# Altium PCB PCBmicro.PcbDoc
Units mil, origin at the board's own origin, x right, y up, seen from the top; angles counter-clockwise.
Board outline 4900 x 4000 mil, 2 copper layers (Top Layer, Bottom Layer); 14 components, 39 nets, 114 pads, 33 vias.
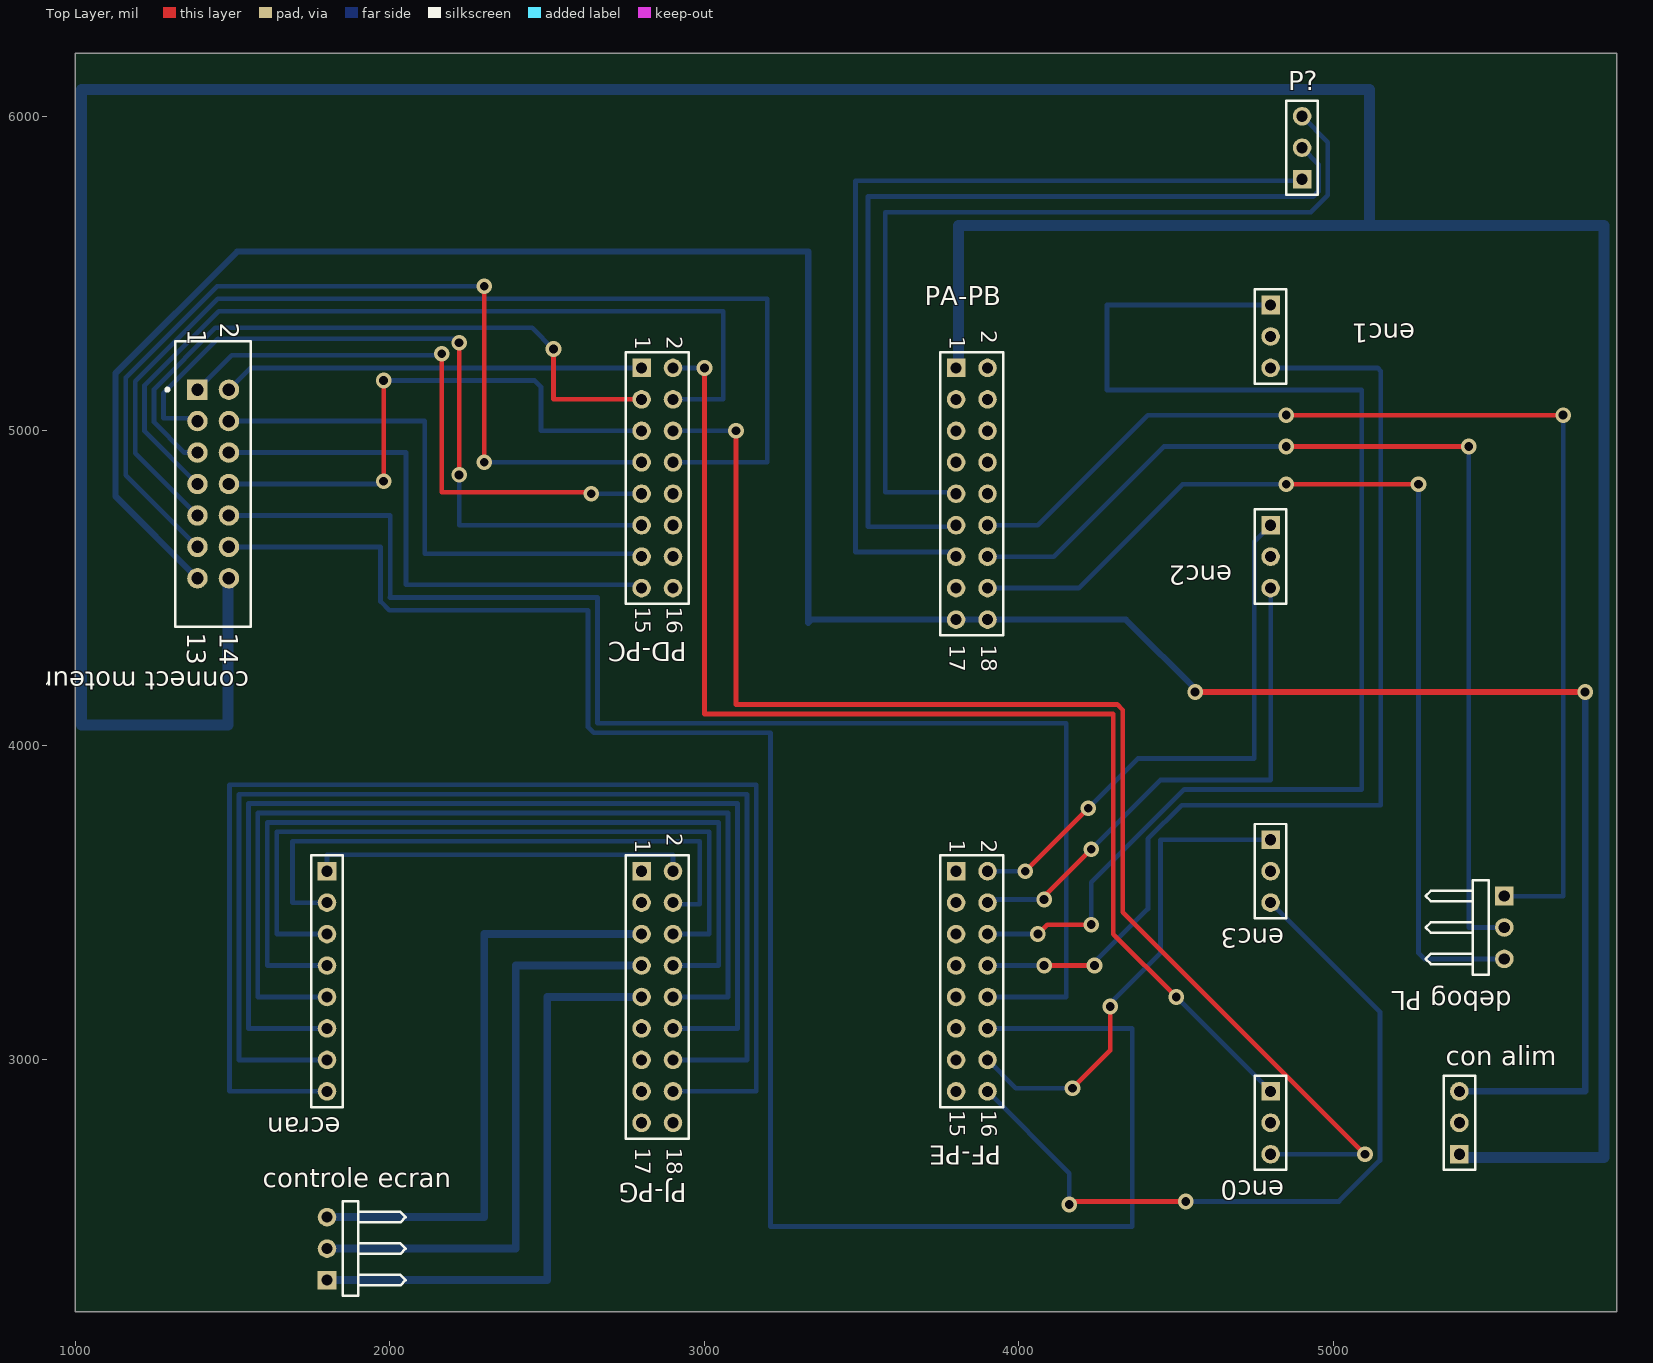
[diagram p0: Top Layer view]
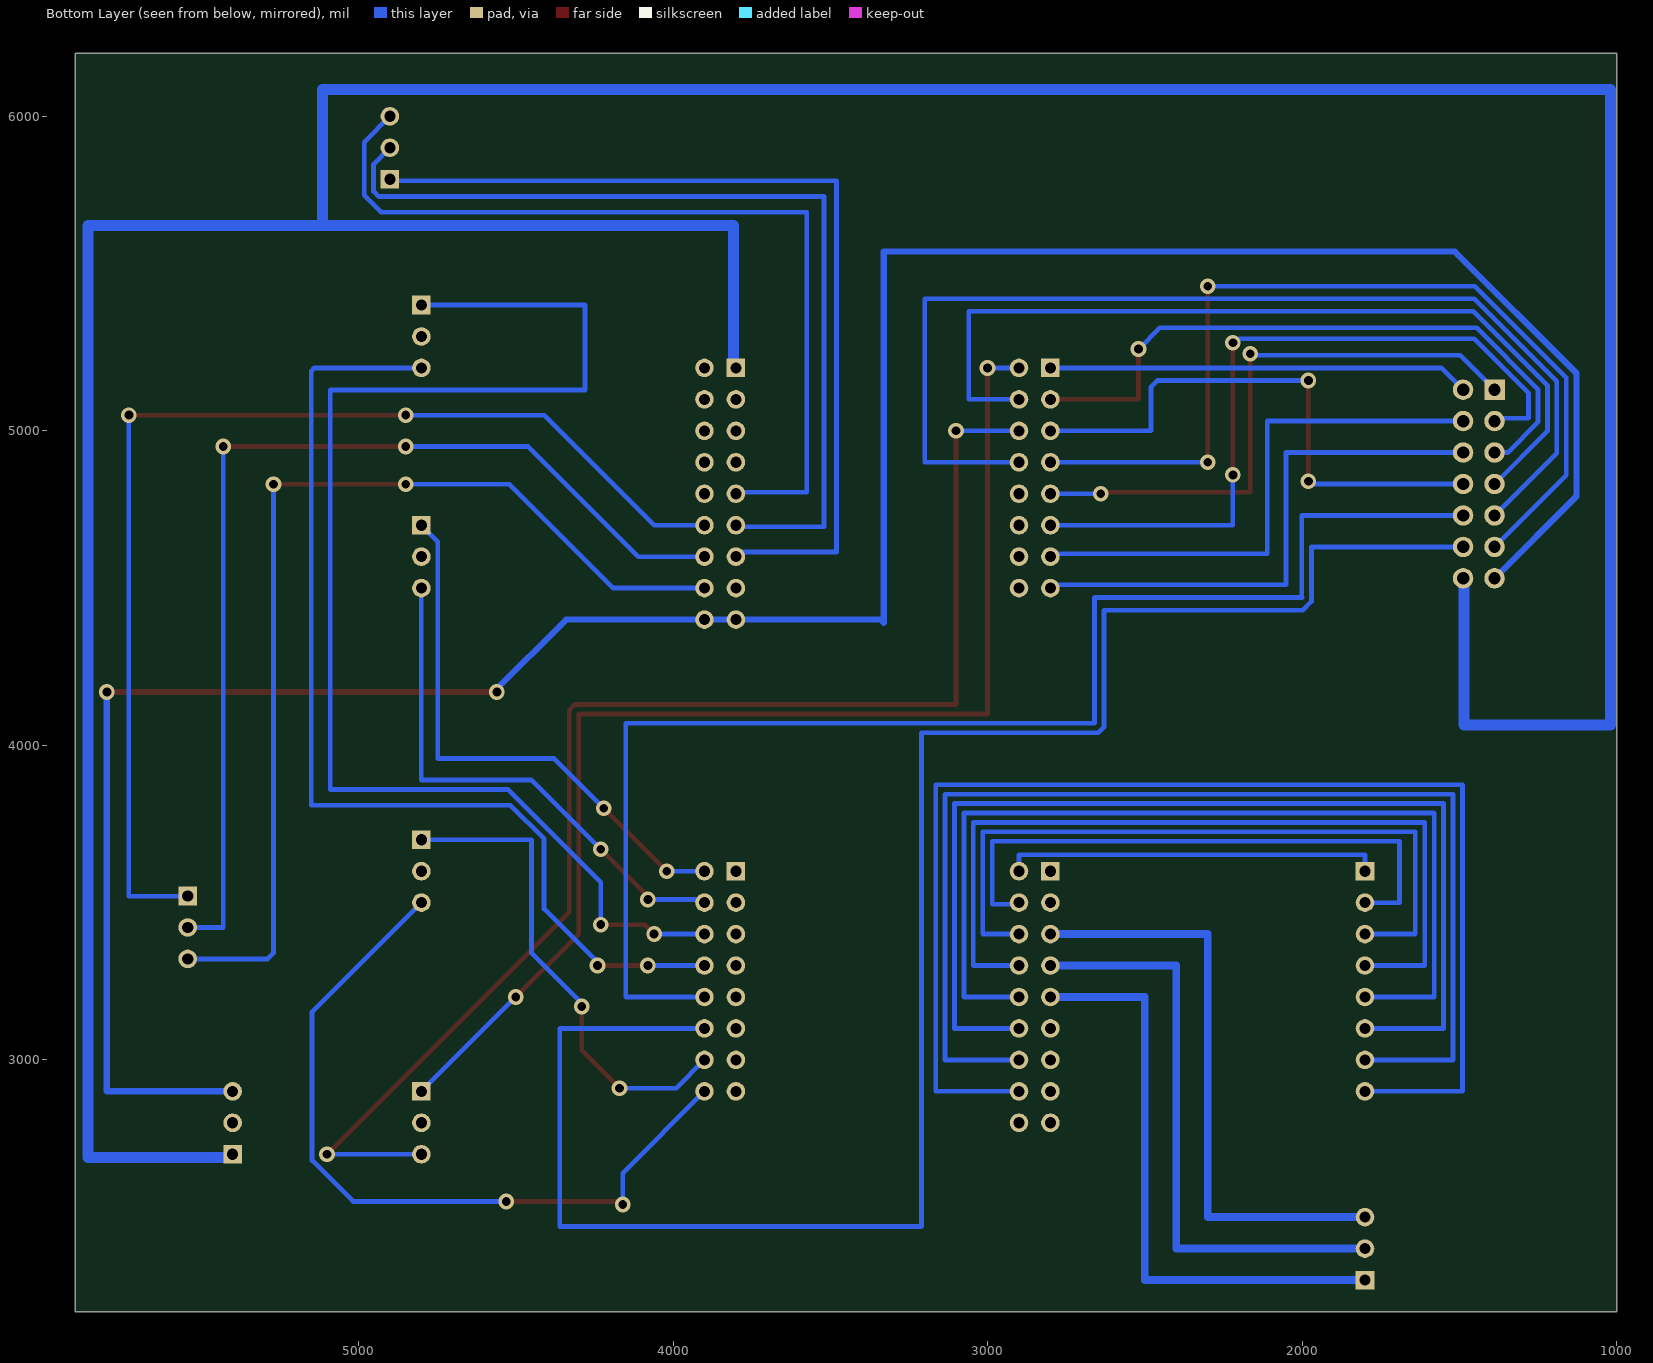
[diagram p1: Bottom Layer view, seen from below]

## Layer stack, top to bottom
Top Layer: signal copper 1.4
Dielectric: dielectric 12.6, FR-4, Dk 4.8
Bottom Layer: signal copper 1.4

## Board outline
1000,6200 5900,6200 5900,2200 1000,2200 1000,2600

## Design rules (kind name [scope] priority, off if disabled: settings)
Clearance [All] p1: gap=15
Height [All] p1: minheight=0 maxheight=4000 prefheight=500
HoleSize [All] p1: absolutevalues=TRUE maxlimit=250 minlimit=1 maxpercent=80.000 minpercent=20.000
HoleToHoleClearance [All] p1: gap=15 allowstackedmicrovias=TRUE
PolygonConnect [All] p1: connectstyle=Relief reliefconductorwidth=10 reliefentries=4 polygonreliefangle="90 Angle"
RoomDefinition designIIIpcb [InComponentClass('designIIIpcb')] p1: confinementstyle=ConfineIn formatcopy=TRUE lockcomponents=FALSE outline 972,1396 6626,1396 6626,6115 972,6115
RoutingVias [All] p1: holewidth=28 width=50 viastyle="Through Hole" minholewidth=28 minwidth=50 maxholewidth=28 maxwidth=50
SilkToSilkClearance [All] p1: silktosilkclearance=3
SilkscreenOverComponentPads [All] p1: minsilkscreentomaskgap=10
SolderMaskExpansion [All] p1: expansion=4
Width [All] p1: maxlimit=250 minlimit=15 preferedwidth=25
23 further rules are at their usual default settings.

## Components (designator, comment, footprint, x,y, rotation, side; value= is the part's Value field where it differs from the comment)
"con alim" "Header 3" HDR1X3 5400,2700 r90 top
"connect moteur" "09 18 114 9421" 9181149421 1438,4831 r270 top
"controle ecran" "Header 3H" HDR1X3H 1800,2300 r90 top
"debog PL" "Header 3H" HDR1X3H 5543,3521 r270 top
ecran "Header 8" HDR1X8 1800,3600 r270 top
enc0 "Header 3" HDR1X3 4800,2900 r270 top
enc1 "Header 3" HDR1X3 4800,5400 r270 top
enc2 "Header 3" HDR1X3 4800,4700 r270 top
enc3 "Header 3" HDR1X3 4800,3700 r270 top
P? "Header 3" HDR1X3 4900,5800 r90 top
PA-PB "Header 9X2" HDR2X9 3800,5200 r270 top
PD-PC "Header 8X2" HDR2X8 2800,5200 r270 top
PF-PE "Header 8X2" HDR2X8 3800,3600 r270 top
PJ-PG "Header 9X2" HDR2X9 2800,3600 r270 top

## Footprints (in the part's own frame and the unit in brackets; to place one, negate y for a bottom-side part, rotate by r counter-clockwise, add the part's x,y. Pads: shape width x height; smd on the part's side, far side on the other; paste and mask are expansions set on the pad)
9181149421 [mm] "Connector; IDC, PCB Transition - 2 Rows, Thru-Hole; 14 Position; Vertical; Pitch 2.54 mm; Body 23.08 x 6.1 x 7.45 mm (LxWxH), Kinked Contacts"
  rect 1.65x1.65 hole 1: 1(-7.62,-1.27)
  round 1.65 hole 1: 2(-7.62,1.27) 3(-5.08,-1.27) 4(-5.08,1.27) 5(-2.54,-1.27) 6(-2.54,1.27) 7(0,-1.27) 8(0,1.27) 9(2.54,-1.27) 10(2.54,1.27) 11(5.08,-1.27) 12(5.08,1.27) 13(7.62,-1.27) 14(7.62,1.27)
  silkscreen extent -11.54,-3.82 11.54,3.05
HDR1X3 [mm] "Connector; Header; 3 Position"
  rect 1.5x1.5 hole 0.9: 1(0,0)
  round 1.5 hole 0.9: 2(2.54,0) 3(5.08,0)
  silkscreen extent -1.27,-1.27 6.35,1.27
HDR1X3H [mm] "Connector; Header; 3 Position; Right Angle"
  rect 1.5x1.5 hole 0.9: 1(0,0)
  round 1.5 hole 0.9: 2(2.54,0) 3(5.08,0)
  silkscreen extent -1.27,-6.35 6.35,-1.27
HDR1X8 [mm] "Connector; Header; 8 Position"
  rect 1.5x1.5 hole 0.9: 1(0,0)
  round 1.5 hole 0.9: 2(2.54,0) 3(5.08,0) 4(7.62,0) 5(10.16,0) 6(12.7,0) 7(15.24,0) 8(17.78,0)
  silkscreen extent -1.27,-1.27 19.05,1.27
HDR2X8 [mm] "Connector; Header; 8x2 Position"
  rect 1.5x1.5 hole 0.9: 1(0,0)
  round 1.5 hole 0.9: 2(0,2.54) 3(2.54,0) 4(2.54,2.54) 5(5.08,0) 6(5.08,2.54) 7(7.62,0) 8(7.62,2.54) 9(10.16,0) 10(10.16,2.54) 11(12.7,0) 12(12.7,2.54) 13(15.24,0) 14(15.24,2.54) 15(17.78,0) 16(17.78,2.54)
  silkscreen extent -1.27,-1.27 19.05,3.81
HDR2X9 [mm] "Connector; Header; 9x2 Position"
  rect 1.5x1.5 hole 0.9: 1(0,0)
  round 1.5 hole 0.9: 2(0,2.54) 3(2.54,0) 4(2.54,2.54) 5(5.08,0) 6(5.08,2.54) 7(7.62,0) 8(7.62,2.54) 9(10.16,0) 10(10.16,2.54) 11(12.7,0) 12(12.7,2.54) 13(15.24,0) 14(15.24,2.54) 15(17.78,0) 16(17.78,2.54) 17(20.32,0) 18(20.32,2.54)
  silkscreen extent -1.27,-1.27 21.59,3.81

## Part data
"con alim" enc0 enc1 enc2 enc3 P?: "Header, 3-Pin"
"connect moteur": "Flat Cable Connector (IDC), PCB Transition Connector, 2 Rows, Kinked Solder Pin, 14 Contacts"
"controle ecran" "debog PL": "Header, 3-Pin, Right Angle"
ecran: "Header, 8-Pin"
PA-PB PJ-PG: "Header, 9-Pin, Dual row"
PD-PC PF-PE: "Header, 8-Pin, Dual row"

## Via types
v1: diameter 50, hole 28, Top Layer to Bottom Layer, 33 vias

## Nets (pads, with @x,y where several pads share a name; then routed paths per layer and width w, separated by ;. In a path a pad name is that pad's centre, name@x,y a point inside that pad or via, vN(x,y) a via of type N, cw(c..) or ccw(c..) an arc to the next point about the centre after c; other vN are vias at no path point)
BLANC0: enc0.3 PD-PC.6 | length 4338.7
  Top Layer w15: v1(3100,5000) 3100,4130 4312.43,4130 4330,4112.43 4330,3470 v1(5100,2700)
  Bottom Layer w15: PD-PC.6 v1(3100,5000) ; enc0.3 v1(5100,2700)
BLANC1: enc1.1 PF-PE.6 | length 4329.5
  Top Layer w15: v1(4060,3400) 4090,3430 v1(4230,3430)
  Bottom Layer w15: PF-PE.6 v1(4060,3400) ; v1(4230,3430) 4230,3564.85 4525.15,3860 5090,3860 5090,5130 4280,5130 4280,5400 enc1.1
BLANC2: enc2.3 PF-PE.4 | length 1677.4
  Top Layer w15: v1(4080,3510) 4080,3520 v1(4230,3670)
  Bottom Layer w15: PF-PE.4 3910,3510 v1(4080,3510) ; v1(4230,3670) 4450,3890 4800,3890 enc2.3
BLANC3: enc3.3 PF-PE.16 | length 2452.8
  Top Layer w15: v1@4180,2550 v1(4530,2550)
  Bottom Layer w15: PF-PE.16 4160,2640 v1(4160,2540) ; v1(4530,2550) 5017.18,2550 5147.5,2680.32 5147.5,3152.5 enc3.3
GND: "con alim.3" "connect moteur.13" PA-PB.17 PA-PB.18 | length 8552.1
  Top Layer w20: v1(4560,4170) v1(5800,4170)
  Bottom Layer w20: 1388,4531 1127.5,4791.5 1127.5,5182.95 1514.55,5570 3330,5570 3330,4390 3340,4400 PA-PB.17 PA-PB.18 4340,4400 v1@4570,4170 ; 5400,2900 5800,2900 v1(5800,4170)
JAUNE0: enc0.1 PD-PC.2 | length 3907.1
  Top Layer w15: v1(3000,5200) 3000,4100 4300,4100 4300,3400 v1(4500,3200)
  Bottom Layer w15: PD-PC.2 v1(3000,5200) ; v1(4500,3200) enc0.1
JAUNE1: enc1.3 PF-PE.8 | length 3331.5
  Top Layer w15: v1(4080,3300) v1(4240,3300)
  Bottom Layer w15: PF-PE.8 v1(4080,3300) ; v1(4240,3300) 4240,3310 4410,3480 4410,3702.43 4517.57,3810 5150,3810 5150,5190 5140,5200 enc1.3
JAUNE2: enc2.1 PF-PE.2 | length 1759.8
  Top Layer w15: v1(4020,3600) v1(4220,3800)
  Bottom Layer w15: PF-PE.2 v1(4020,3600) ; v1(4220,3800) 4377.97,3957.97 4747.97,3957.97 4747.97,4647.97 enc2.1
JAUNE3: enc3.1 PF-PE.14 | length 1553.3
  Top Layer w15: v1(4170,2910) 4290,3030 v1(4290,3170)
  Bottom Layer w15: PF-PE.14 3990,2910 v1(4170,2910) ; v1@4290,3180 4450,3340 4450,3700 enc3.1
"Netconnect moteur_1": "connect moteur.1" PD-PC.9 | length 1887.1
  Top Layer w15: v1(2165,5245) 2165,4805 v1@2635,4805
  Bottom Layer w15: 1388,5131 1497,5240 v1@2160,5240 ; v1(2640,4800) PD-PC.9
"Netconnect moteur_2": "connect moteur.2" PD-PC.1 | length 1340.6
  Bottom Layer w15: 1488,5131 1557,5200 PD-PC.1
"Netconnect moteur_3": "connect moteur.3" PD-PC.11 | length 2350.6
  Top Layer w15: v1(2220,4860) v1(2220,5280)
  Bottom Layer w15: 1388,5031 1379,5040 1280,5040 1280,5119.78 1452.72,5292.5 v1@2207.5,5292.5 ; v1(2220,4860) 2220,4700 PD-PC.11
"Netconnect moteur_4": "connect moteur.4" PD-PC.13 | length 1725
  Bottom Layer w15: 1488,5031 2111,5031 2111,4609 PD-PC.13@2791,4609
"Netconnect moteur_5": "connect moteur.5" PD-PC.3 | length 2101.5
  Top Layer w15: v1(2520,5260) 2520,5100 PD-PC.3
  Bottom Layer w15: 1388,4931 1346.57,4931 1250,5027.57 1250,5132.21 1445.29,5327.5 2452.5,5327.5 v1(2520,5260)
"Netconnect moteur_6": "connect moteur.6" PD-PC.15 | length 1736.6
  Bottom Layer w15: 1488,4931 2051,4931 2051,4511 2789,4511 PD-PC.15
"Netconnect moteur_7": "connect moteur.7" PD-PC.4 | length 2760.7
  Bottom Layer w15: 1388,4831 1220,4999 1220,5144.63 1455.37,5380 3060,5380 3060,5100 PD-PC.4
"Netconnect moteur_8": "connect moteur.8" PD-PC.5 | length 1784
  Top Layer w15: v1(1980,4840) v1(1980,5160)
  Bottom Layer w15: 1488,4831 1971,4831 v1(1980,4840) ; v1(1980,5160) 2460,5160 2480,5140 2480,5000 PD-PC.5
"Netconnect moteur_9": "connect moteur.9" PD-PC.8 | length 3447
  Bottom Layer w15: 1388,4731 1190,4929 1190,5157.06 1452.94,5420 3200,5420 3200,4900 PD-PC.8
"Netconnect moteur_10": "connect moteur.10" PF-PE.10 | length 4444.4
  Bottom Layer w15: 1488,4731 2001,4731 2001,4471 2000,4470 2660,4470 2660,4070 4150,4070 4150,3200 PF-PE.10
"Netconnect moteur_11": "connect moteur.11" PD-PC.7 | length 2953.3
  Top Layer w15: v1(2300,4900) v1(2300,5460)
  Bottom Layer w15: 1388,4631 1160,4859 1160,5169.49 1450.51,5460 v1(2300,5460) ; v1(2300,4900) PD-PC.7
"Netconnect moteur_12": "connect moteur.12" PF-PE.12 | length 6096.6
  Bottom Layer w15: 1488,4631 1970,4631 1970,4457.57 1997.57,4430 2630,4430 2630,4057.57 2647.57,4040 3210,4040 3210,2470 4360,2470 4360,3100 PF-PE.12
"Netcontrole ecran_1": "controle ecran.1" PJ-PG.9 | length 1900
  Bottom Layer w25: 1800,2300 2500,2300 2500,3200 PJ-PG.9
"Netcontrole ecran_2": "controle ecran.2" PJ-PG.7 | length 1900
  Bottom Layer w25: 1800,2400 2400,2400 2400,3300 PJ-PG.7
"Netcontrole ecran_3": "controle ecran.3" PJ-PG.5 | length 1900
  Bottom Layer w25: 1800,2500 2300,2500 2300,3400 PJ-PG.5
"Netdebog PL_1": "debog PL.1" PA-PB.12 | length 3692.4
  Top Layer w15: v1(4850,5050) v1(5730,5050)
  Bottom Layer w15: PA-PB.12 4060,4700 4410,5050 v1(4850,5050) ; 5543,3521 5544,3520 5730,3520 v1(5730,5050)
"Netdebog PL_2": "debog PL.2" PA-PB.14 | length 3318.4
  Top Layer w15: v1(4850,4950) v1(5430,4950)
  Bottom Layer w15: PA-PB.14 4110,4600 4460,4950 v1(4850,4950) ; v1(5430,4950) 5430,3420 5431,3421 5543,3421
"Netdebog PL_3": "debog PL.3" PA-PB.16 | length 3277.6
  Top Layer w15: v1(4850,4830) v1(5270,4830)
  Bottom Layer w15: PA-PB.16 4190,4500 4520,4830 v1(4850,4830) ; v1(5270,4830) 5270,3340 5289,3321 5543,3321
Netecran_1: ecran.1 PJ-PG.2 | length 1204.1
  Bottom Layer w15: ecran.1 1800,3652.03 2900,3652.03 PJ-PG.2
Netecran_2: ecran.2 PJ-PG.4 | length 1890
  Bottom Layer w15: ecran.2 1690,3500 1690,3695 2985,3695 2985,3495 2900,3495 PJ-PG.4
Netecran_3: ecran.3 PJ-PG.6 | length 2300
  Bottom Layer w15: ecran.3 1640,3400 1640,3725 3015,3725 3015,3400 PJ-PG.6
Netecran_4: ecran.4 PJ-PG.8 | length 2680
  Bottom Layer w15: ecran.4 1610,3300 1610,3755 3045,3755 3045,3300 PJ-PG.8
Netecran_5: ecran.5 PJ-PG.10 | length 3060
  Bottom Layer w15: ecran.5 1580,3200 1580,3785 3075,3785 3075,3200 PJ-PG.10
Netecran_6: ecran.6 PJ-PG.12 | length 3440
  Bottom Layer w15: ecran.6 1550,3100 1550,3815 3105,3815 3105,3100 PJ-PG.12
Netecran_7: ecran.7 PJ-PG.14 | length 3820
  Bottom Layer w15: ecran.7 1520,3000 1520,3845 3135,3845 3135,3000 PJ-PG.14
Netecran_8: ecran.8 PJ-PG.16 | length 4200
  Bottom Layer w15: ecran.8 1490,2900 1490,3875 3165,3875 3165,2900 PJ-PG.16
NetP?_1: P?.1 PA-PB.13 | length 2911.1
  Bottom Layer w15: PA-PB.13@3789,4615 3480,4615 3480,5795 4895,5795 P?.1
NetP?_2: P?.2 PA-PB.11 | length 2936.1
  Bottom Layer w15: PA-PB.11@3807,4695 3520,4695 3520,5745 4935.88,5745 4952.03,5761.15 4952.03,5847.97 P?.2
NetP?_3: P?.3 PA-PB.9 | length 2828.5
  Bottom Layer w15: PA-PB.9@3799,4805 3575,4805 3575,5695 4928.3,5695 4982.03,5748.73 4982.03,5917.97 P?.3
VCC: "con alim.1" "connect moteur.14" PA-PB.1 | length 13411.1
  Bottom Layer w35: 1485,4528 1485,4065 1020,4065 1020,6085 5115,6085 5115,5653 ; PA-PB.1@3808,5196 3808,5653 5115,5653 ; 5400,2700 5410,2690 5860,2690 5860,5653 5115,5653
pads on no net: "con alim.2" enc0.2 enc1.2 enc2.2 enc3.2 PA-PB.2 PA-PB.3 PA-PB.4 PA-PB.5 PA-PB.6 PA-PB.7 PA-PB.8 PA-PB.10 PA-PB.15 PD-PC.10 PD-PC.12 PD-PC.14 PD-PC.16 PF-PE.1 PF-PE.3 PF-PE.5 PF-PE.7 PF-PE.9 PF-PE.11 PF-PE.13 PF-PE.15 PJ-PG.1 PJ-PG.3 PJ-PG.11 PJ-PG.13 PJ-PG.15 PJ-PG.17 PJ-PG.18

## Text inside footprints (layer, text, board x,y; h text height)
"connect moteur": Top Overlay "13" at 1355.32,4357.97 h59.06 r270; Top Overlay "14" at 1458.47,4357.97 h59.06 r270; Top Overlay "1" at 1356.5,5323.71 h59.06 r270; Top Overlay "2" at 1460.44,5343.39 h59.06 r270
PA-PB: Top Overlay "18" at 3880,4320 h50 r270; Top Overlay "17" at 3780,4320 h50 r270; Top Overlay "1" at 3780,5300 h50 r270; Top Overlay "2" at 3880,5320 h50 r270
PD-PC: Top Overlay "2" at 2880,5300 h50 r270; Top Overlay "1" at 2780,5300 h50 r270; Top Overlay "15" at 2780,4440 h50 r270; Top Overlay "16" at 2880,4440 h50 r270
PF-PE: Top Overlay "2" at 3880,3700 h50 r270; Top Overlay "1" at 3780,3700 h50 r270; Top Overlay "15" at 3780,2840 h50 r270; Top Overlay "16" at 3880,2840 h50 r270
PJ-PG: Top Overlay "18" at 2880,2720 h50 r270; Top Overlay "17" at 2780,2720 h50 r270; Top Overlay "1" at 2780,3700 h50 r270; Top Overlay "2" at 2880,3720 h50 r270